# Altium PCB MAIN.PcbDoc
Units mil, origin at the board's own origin, x right, y up, seen from the top; angles counter-clockwise.
Board outline 6000 x 4000 mil, 2 copper layers (Top Layer, Bottom Layer); 86 components, 71 nets, 333 pads, 40 vias.
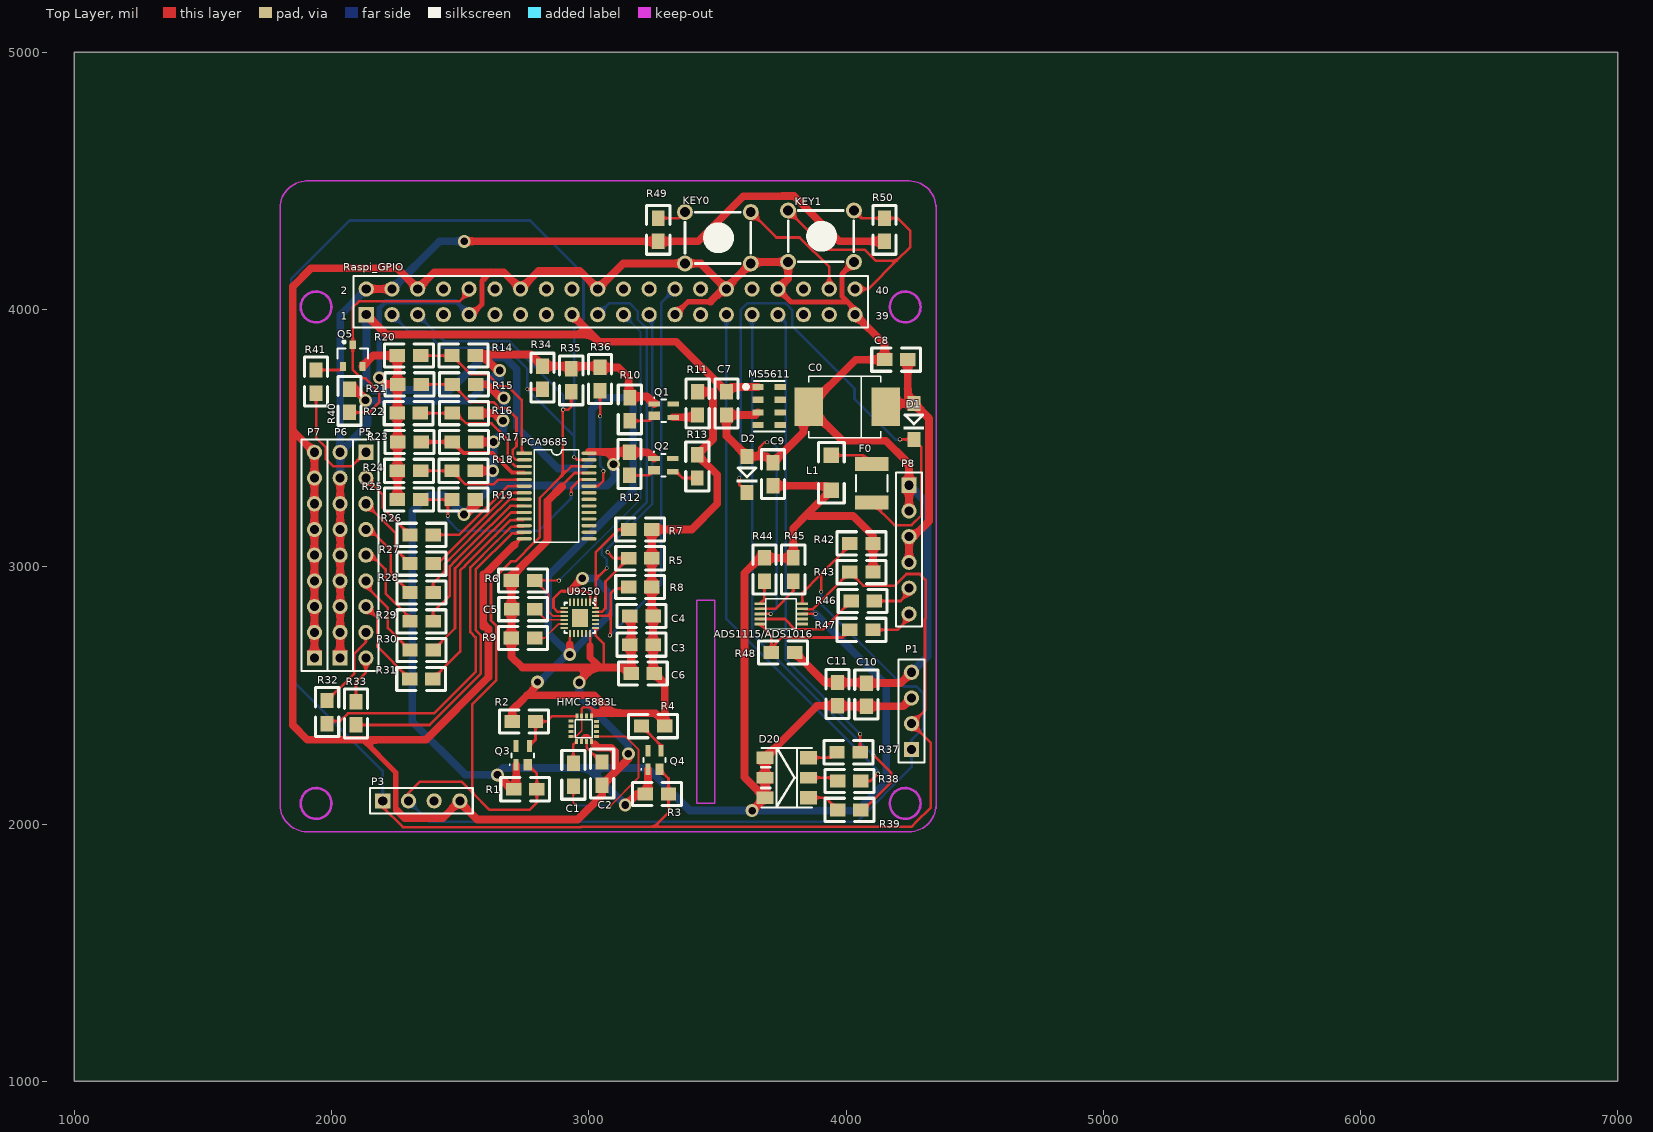
[diagram p0: Top Layer view]
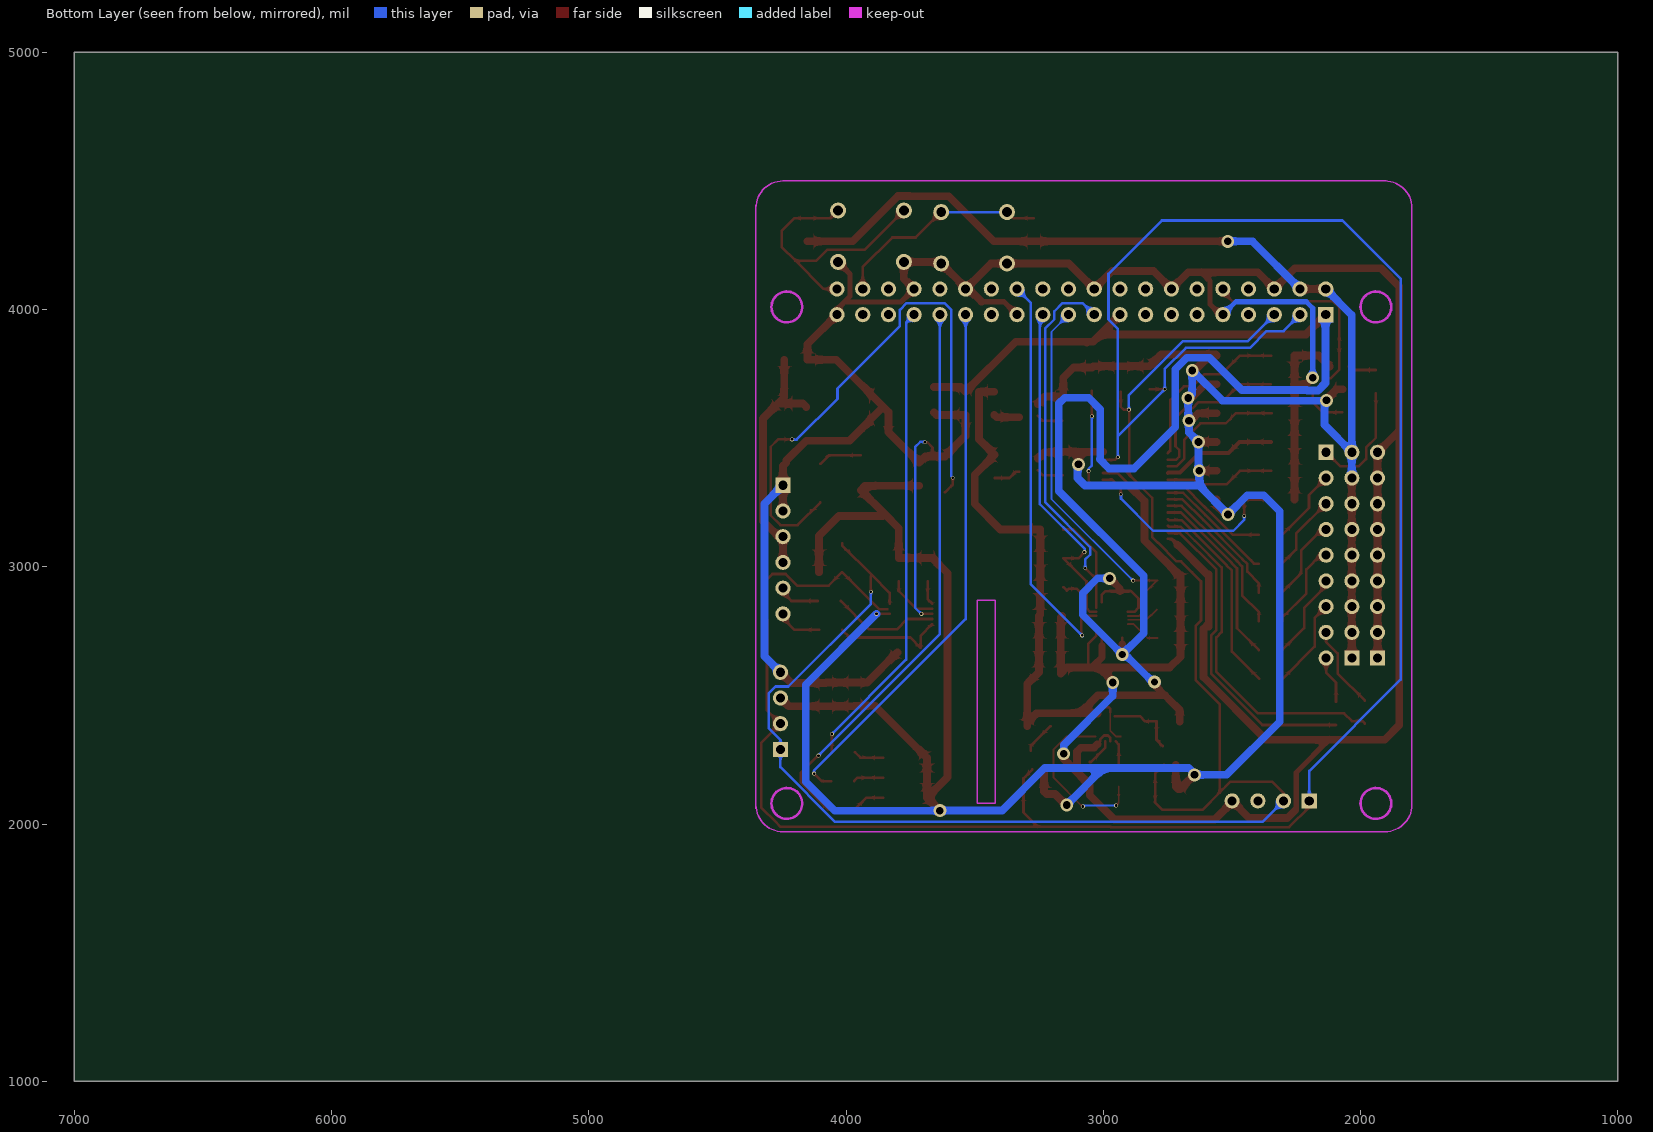
[diagram p1: Bottom Layer view, seen from below]

## Layer stack, top to bottom
Top Solder: solder mask 0.4, Solder Resist, Dk 3.5
Top Layer: signal copper 1.4
Dielectric 1: dielectric 12.6, FR-4, Dk 4.8
Bottom Layer: signal copper 1.4
Bottom Solder: solder mask 0.4, Solder Resist, Dk 3.5

## Board outline
1000,1000 7000,1000 7000,5000 1000,5000

## Design rules (kind name [scope] priority, off if disabled: settings)
Clearance [All] p1: gap=10
PolygonConnect [All] p1: connectstyle=Relief reliefconductorwidth=10 reliefentries=4 polygonreliefangle="90 Angle" airgapwidth=10
RoutingVias [All] p1: holewidth=28 width=50 viastyle="Through Hole" minholewidth=28 minwidth=50 maxholewidth=28 maxwidth=50
SolderMaskExpansion [All] p1: expansion=4
Width [All] p1: maxlimit=100 minlimit=2 preferedwidth=30
30 further rules are at their usual default settings.

## Classes and differential pairs
component class ADS1115: ADS1115/ADS1016 C10 C11 R42 R43 R44 R45 R46 R47 R48
component class 9250: C3 C4 C5 C6 R5 R6 R7 R8 R9 U9250
component class HMC5883L: C1 C2 Q3 Q4 R1 R2 R3 R4
component class MS5611: C7 MS5611 Q1 Q2 R10 R11 R12 R13
component class PCA9685: C9 P3 P5 P6 P7 PCA9685 R14 R15 R16 R17 R18 R19 R20 R21 R23 R24 R25 R26 R27 R28 R29 R30 R31 R32 R33 R34 R35 R36
component class "power source": C0 C8 D1 D2 F0 L1 P8 Q5 R40 R41
component class Rpi_GPIO: D20 KEY0 KEY1 P1 R37 R38 R39 R49 R50 Raspi_GPIO

## Components (designator, comment, footprint, x,y, rotation, side; value= is the part's Value field where it differs from the comment)
ADS1115/ADS1016 "ADS1115/ADS1015" PCBComponent_1#1 3531.14,3190.71 r90 top
C0 "Cap-Pol-ER" DIODE_SMC 4005,3621.49 r180 top
C1 "224" 0805 2940.06,2236.09 r270 top
C2 "224" 0805 3051.95,2151.09 r90 top
C3 "0.1uF" 0805 3160,2697.02 r0 top
C4 "0.01uF" 0805 3160,2809.03 r0 top
C5 "0.1uF" 0805 2700,2835.06 r0 top
C6 "10uF" 0805 3165,2585.01 r0 top
C7 "0.1uF" 0805 3535.37,3680 r270 top
C8 "104" 0805 4240,3805 r180 top
C9 "0.1uF" 0805 3716.05,3315 r90 top
C10 "0.1uF" 0805 4079.1,2548 r270 top
C11 "1uF" 0805 3967.09,2550 r270 top
D1 "1N4148" DIODE_SOP 4264.01,3635 r270 top
D2 "Diode-Z" DIODE_SOP 3615.1,3428.96 r270 top
D20 "LED-RGB" LED_5050_RGB 3790,2170 r0 top
F0 "500MA" 1812 4100,3325 r90 top
"HMC 5883L" "HMC 5883L" PCBComponent_1#2 2511.3,2456.77 r90 top
KEY0 "PWR_KEY" KEY_M 3374.09,4378.95 r0 top
KEY1 "PWR_KEY" KEY_M 3775,4385 r0 top
L1 "Inductor" 1206 3943.12,3432.98 r270 top
MS5611 "MS5611" MS5611 3701.16,3624.61 r0 top
P1 "Header 4" HDR1X4 4255,2290 r90 top
P3 "Header 4" HDR1X4 2199,2090 r0 top
P5 "Header 9" HDR1X9 2133.46,3445 r270 top
P6 "Header 9" HDR1X9 2033.46,2645 r90 top
P7 "Header 9" HDR1X9 1933.46,2645 r90 top
P8 "Header 6" HDR1X6 4245,3317 r270 top
PCA9685 "PCA9685PW" PCA9685PW 2875,3275 r0 top
Q1 "MOSFET-N" SOT-343_N 3291.42,3606.7 r0 top
Q2 "MOSFET-N" SOT-343_N 3290,3395 r0 top
Q3 "MOSFET-N" SOT-343_N 2743.3,2266.94 r90 top
Q4 "MOSFET-N" SOT-343_N 3255.59,2248.58 r90 top
Q5 "9013" SOT23_L 2082.4,3820.97 r90 top
R1 "Res2" 0805 2797.99,2135 r180 top
R2 "Res2" 0805 2792.99,2398.75 r180 top
R3 "Res2" 0805 3310,2116.64 r180 top
R4 "Res2" 0805 3205,2380.52 r0 top
R5 "Res2" 0805 3245,3032.93 r180 top
R6 "Res2" 0805 2789.38,2946.95 r180 top
R7 "Res2" 0805 3245,3144.94 r180 top
R8 "Res2" 0805 3245,2920.92 r180 top
R9 "Res2" 0805 2699.38,2723.05 r0 top
R10 "Res2" 0805 3159.48,3567.01 r90 top
R11 "Res2" 0805 3423.23,3590 r90 top
R12 "Res2" 0805 3158.06,3355 r90 top
R13 "Res2" 0805 3421.81,3345 r90 top
R14 "Res2" 0805 2558.3,3821.07 r180 top
R15 "Res2" 0805 2560,3709.06 r180 top
R16 "Res2" 0805 2560,3597.05 r180 top
R17 "Res2" 0805 2560,3485.04 r180 top
R18 "Res2" 0805 2558.3,3373.03 r180 top
R19 "Res2" 0805 2558.3,3261.02 r180 top
R20 "Res2" 0805 2346.3,3821.07 r180 top
R21 "Res2" 0805 2347.99,3709.06 r180 top
R22 "Res2" 0805 2345,3597.05 r180 top
R23 "Res2" 0805 2347.99,3485.04 r180 top
R24 "Res2" 0805 2346.3,3373.03 r180 top
R25 "Res2" 0805 2346.3,3261.02 r180 top
R26 "Res2" 0805 2305,3124.13 r0 top
R27 "Res2" 0805 2305,3012.12 r0 top
R28 "Res2" 0805 2305,2900.11 r0 top
R29 "Res2" 0805 2305,2788.1 r0 top
R30 "Res2" 0805 2305,2676.09 r0 top
R31 "Res2" 0805 2303.41,2564.08 r0 top
R32 "Res2" 0805 1983.05,2480 r270 top
R33 "Res2" 0805 2095.06,2475 r270 top
R34 "Res2" 0805 2819.94,3690 r90 top
R35 "Res2" 0805 2931.95,3680 r90 top
R36 "Res2" 0805 3043.96,3685 r90 top
R37 "Res2" 0805 4055,2278.9 r180 top
R38 "Res2" 0805 4058.12,2166.89 r180 top
R39 "Res2" 0805 4058.12,2054.88 r180 top
R40 "Res2" 0805 2069.94,3600 r90 top
R41 "Res2" 0805 1940,3765 r270 top
R42 "Res2" 0805 4105,3090.97 r180 top
R43 "Res2" 0805 4105,2978.96 r180 top
R44 "Res2" 0805 3683.05,3034.26 r270 top
R45 "Res2" 0805 3795.06,3034.26 r270 top
R46 "Res2" 0805 4020,2867.07 r0 top
R47 "Res2" 0805 4015,2755.06 r0 top
R48 "Res2" 0805 3710,2667.07 r0 top
R49 "Res2" 0805 3269.94,4265 r90 top
R50 "Res2" 0805 4150,4265 r90 top
Raspi_GPIO "Header 20X2" HDR2X20 2135,3980 r0 top
U9250 "MPU-9250" QFN40P300X300X105-25N 2965.63,2801.02 r270 top

## Footprints (in the part's own frame and the unit in brackets; to place one, negate y for a bottom-side part, rotate by r counter-clockwise, add the part's x,y. Pads: shape width x height; smd on the part's side, far side on the other; paste and mask are expansions set on the pad)
0805 [mil]
  rect 60x50 smd: 1(0,-0.06) 2(90,-0.06)
  silkscreen extent -50,-45 140,45
1206 [mil]
  rect 60x60 smd: 1(0,0) 2(135,0)
  silkscreen extent -50,-50 185,50
1812 [mm] "Chip Capacitor, Body 4.5x3.2mm, IPC High Density"
  rect 1.4x3.3 smd: 1(-1.9,0) 2(1.9,0)
  silkscreen extent -0.8,-1.55 0.8,1.55, body extent -2.4,-1.7 2.4,1.7, height 1.4
DIODE_SMC [mil] "Diode; 2 Leads"
  rect 110x150 smd: 1(-150,0) 2(150,0)
  silkscreen extent -130,-120 150,120
DIODE_SOP [mm]
  rect 1.5x1.3 smd: 1(0,0) 2(3.556,0)
  silkscreen extent 1.14,-1.02 2.56,1.02
HDR1X4 [mm] "Connector; Header; 4 Position"
  rect 1.5x1.5 hole 0.9: 1(0,0)
  round 1.5 hole 0.9: 2(2.54,0) 3(5.08,0) 4(7.62,0)
  silkscreen extent -1.27,-1.27 8.89,1.27
HDR1X6 [mm] "Connector; Header; 6 Position"
  rect 1.5x1.5 hole 0.9: 1(0,0)
  round 1.5 hole 0.9: 2(2.54,0) 3(5.08,0) 4(7.62,0) 5(10.16,0) 6(12.7,0)
  silkscreen extent -1.27,-1.27 13.97,1.27
HDR1X9 [mm] "Connector; Header; 9 Position"
  rect 1.5x1.5 hole 0.9: 1(0,0)
  round 1.5 hole 0.9: 2(2.54,0) 3(5.08,0) 4(7.62,0) 5(10.16,0) 6(12.7,0) 7(15.24,0) 8(17.78,0) 9(20.32,0)
  silkscreen extent -1.27,-1.27 21.59,1.27
HDR2X20 [mm] "Connector; Header; 20x2 Position"
  rect 1.5x1.5 hole 0.9: 1(0,0)
  round 1.5 hole 0.9: 2(0,2.54) 3(2.54,0) 4(2.54,2.54) 5(5.08,0) 6(5.08,2.54) 7(7.62,0) 8(7.62,2.54) 9(10.16,0) 10(10.16,2.54) 11(12.7,0) 12(12.7,2.54) 13(15.24,0) 14(15.24,2.54) 15(17.78,0) 16(17.78,2.54) 17(20.32,0) 18(20.32,2.54) 19(22.86,0) 20(22.86,2.54) 21(25.4,0) 22(25.4,2.54) 23(27.94,0) 24(27.94,2.54) 25(30.48,0) 26(30.48,2.54) 27(33.02,0) 28(33.02,2.54) 29(35.56,0) 30(35.56,2.54) 31(38.1,0) 32(38.1,2.54) 33(40.64,0) 34(40.64,2.54) 35(43.18,0) 36(43.18,2.54) 37(45.72,0) 38(45.72,2.54) 39(48.26,0) 40(48.26,2.54)
  silkscreen extent -1.27,-1.27 49.53,3.81
KEY_M [mil]
  round 62 hole 38: 1(0,0) 1(255.91,0) 2(0,-200) 2(255.91,-200)
  silkscreen extent 0,-200 255,0
LED_5050_RGB [mm]
  rect 1.7x1.25 smd: A(-2.658,-1.721) A(-2.658,2.229)
  rect 1.7x1.1 smd: A(-2.658,0.254) K2(1.642,0.254)
  rect 1.7x1.3 smd: K1(1.642,2.229) K3(1.642,-1.721)
  silkscreen extent -3.05,-2.67 1.99,3.17
MS5611 [mm]
  rect 1.1x0.6 smd: 1(-1.1,1.875) 2(-1.1,0.625) 3(-1.1,-0.625) 4(-1.1,-1.875) 5(1.1,-1.875) 6(1.1,-0.625) 7(1.1,0.625) 8(1.1,1.875)
  silkscreen extent -2.41,-2.5 1.5,2.5
PCA9685PW [mm]
  rect 1.5x0.325 smd: 1(-3.2,4.225)
  oval 1.5x0.325 smd: 2(-3.2,3.575) 3(-3.2,2.925) 4(-3.2,2.275) 5(-3.2,1.625) 6(-3.2,0.975) 7(-3.2,0.325) 8(-3.2,-0.325) 9(-3.2,-0.975) 10(-3.2,-1.625) 11(-3.2,-2.275) 12(-3.2,-2.925) 13(-3.2,-3.575) 14(-3.2,-4.225) 15(3.2,-4.225) 16(3.2,-3.575) 17(3.2,-2.925) 18(3.2,-2.275) 19(3.2,-1.625) 20(3.2,-0.975) 21(3.2,-0.325) 22(3.2,0.325) 23(3.2,0.975) 24(3.2,1.625) 25(3.2,2.275) 26(3.2,2.925) 27(3.2,3.575) 28(3.2,4.225)
  silkscreen extent -2.2,-4.55 2.2,4.55
PCBComponent_1#1 [mm]
  rect 0.27x1.1 smd: 1(-8.5,-3.4) 2(-9,-3.4) 3(-9.5,-3.4) 4(-10,-3.4) 5(-10.5,-3.4) 6(-10.5,-7.6) 7(-10,-7.6) 8(-9.5,-7.6) 9(-9,-7.6) 10(-8.5,-7.6)
  silkscreen extent -11,-7 -8,-4
PCBComponent_1#2 [mm]
  rect 0.5x0.3 smd: 1(-0.95,-11.25) 2(-0.95,-11.7) 3(-0.95,-12.2) 4(-0.95,-12.7) 9(-3.45,-12.7) 10(-3.45,-12.2) 11(-3.45,-11.7) 12(-3.45,-11.2)
  rect 0.3x0.5 smd: 5(-1.5,-13.175) 6(-1.95,-13.175) 7(-2.45,-13.175) 8(-2.95,-13.175) 13(-2.95,-10.675) 14(-2.45,-10.675) 15(-1.95,-10.675) 16(-1.45,-10.675)
  silkscreen extent -3.08,-12.78 -1.33,-11.07
QFN40P300X300X105-25N [mm]
  rect 0.7x0.2 smd paste-25.4 mask-25.4: 1(-1.55,1) 2(-1.55,0.6) 3(-1.55,0.2) 4(-1.55,-0.2) 5(-1.55,-0.6) 6(-1.55,-1) 13(1.55,-1) 14(1.55,-0.6) 15(1.55,-0.2) 16(1.55,0.2) 17(1.55,0.6) 18(1.55,1)
  rect 0.2x0.7 smd paste-25.4 mask-25.4: 7(-1,-1.55) 8(-0.6,-1.55) 9(-0.2,-1.55) 10(0.2,-1.55) 11(0.6,-1.55) 12(1,-1.55) 19(1,1.55) 20(0.6,1.55) 21(0.2,1.55) 22(-0.2,1.55) 23(-0.6,1.55) 24(-1,1.55)
  rect 1.75x1.6 smd mask-25.4: 25(0,0)
  silkscreen extent -1.93,-1.5 1.5,1.63
SOT23_L [mm] "SOT23, 3-Leads, Body 2.9x1.3mm, Pitch 0.95mm, Lead Span 2.3mm - Reverse Pinning, IPC High Density"
  rect 0.85x0.6 smd: 1(1.075,0) 2(-1.075,-0.95) 3(-1.075,0.95)
  silkscreen extent -0.3,-1.5 1.47,1.5, body extent -0.7,-1.5 0.7,1.5, height 1.1
SOT-343_N [mm] "SOT343, 4-Leads, Body 2x1.3 mm, Pitch 1.3mm, Lead Span 2.1mm, IPC Medium Density"
  rect 1.15x0.5 smd: 1(-0.925,0.65) 3(0.925,-0.65) 4(0.925,0.65)
  rect 1.15x0.8 smd: 2(-0.925,-0.5)
  silkscreen extent -0.97,-1.1 0.2,1.35, body extent -0.7,-1.1 0.7,1.1, height 1

## Part data
C0: "插件电解电容"
C1 C2 C3 C4 C5 C6 C7 C8 C9 C10 C11: library part C
D1: library part Diode, "二极管"
D2: "稳压二极管"
D20: "三基色LED"
F0: library part "Fuse 2", "Fuse"
KEY0 KEY1: library part KEY_M
L1: "电感"
P1 P3: "Header, 4-Pin"
P5 P6 P7: "Header, 9-Pin"
P8: "Header, 6-Pin"
Q1 Q2 Q3 Q4: library part MOSFET-N1, "MOSFET"
Q5: library part 2N3904, "NPN General Purpose Amplifier"
R1 R2 R3 R4 R5 R6 R7 R8 R9 R10 R11 R12 R13 R14 R15 R16 R17 R18 R19 R20 R21 R22 R23 R24 R25 R26 R27 R28 R29 R30 R31 R32 R33 R34 R35 R36 R37 R38 R39 R40 R41 R42 R43 R44 R45 R46 R47 R48 R49 R50: "Resistor"
Raspi_GPIO: "Header, 20-Pin, Dual row"

## Via types
v1: diameter 15, hole 10, Top Layer to Bottom Layer, 22 vias
v2: diameter 50, hole 30, Top Layer to Bottom Layer, 15 vias
v3: diameter 50, hole 28, Top Layer to Bottom Layer, 3 vias

## Nets (pads, with @x,y where several pads share a name; then routed paths per layer and width w, separated by ;. In a path a pad name is that pad's centre, name@x,y a point inside that pad or via, vN(x,y) a via of type N, cw(c..) or ccw(c..) an arc to the next point about the centre after c; other vN are vias at no path point)
ADDR: ADS1115/ADS1016.1 R44.2 | length 95
  Top Layer w10: ADS1115/ADS1016.1@3665,2856.7 3682.99,2874.69 R44.2
ALERT: ADS1115/ADS1016.2 R45.2 | length 197.7
  Top Layer w10: ADS1115/ADS1016.2 3726.38,2836.38 3795,2905 R45.2
AN0: P8.5 R46.2 | length 165.7
  Top Layer w10: R46.2 4212.01,2867.01 4245,2900 P8.5
AN1: P8.6 R47.2 | length 175.6
  Top Layer w10: R47.2 4199.95,2755 4245,2800.05 P8.6
BACKUP_1: Raspi_GPIO.11
BACKUP_2: Raspi_GPIO.13
"BEC 5V": C0.1 C8.1 D1.1 P8.3 P8.4 | length 978.9
  Top Layer w30: C0.1 4168.51,3635 D1.1 ; C8.1 4240,3659.01 D1.1 ; P8.4 P8.3 4261.95,3117 4322.5,3177.55 4322.5,3576.51 D1.1
BEC_5V: 
GND: "HMC 5883L.9" "HMC 5883L.11" ADS1115/ADS1016.3 C0.2 C2.1 C3.1 C4.1 C5.1 C6.1 C7.2 C8.2 C9.2 C10.1 C11.1 D2.1 KEY0.2 KEY1.2 MS5611.3 P1.4 P3.4 P7.1 P7.2 P7.3 P7.4 P7.5 P7.6 P7.7 P7.8 P7.9 P8.1 P8.2 PCA9685.14 PCA9685.25 Q5.2 R6.2 R9.1 R20.2 R21.2 R22.2 R23.2 R24.2 R25.2 R48.2 Raspi_GPIO.6 Raspi_GPIO.9 Raspi_GPIO.14 Raspi_GPIO.20 Raspi_GPIO.25 Raspi_GPIO.30 Raspi_GPIO.34 Raspi_GPIO.39 U9250.18 U9250.19 | length 17000.2
  Top Layer w10: 2711,3085 2734.66,3108.66 PCA9685.14 ; 2896.06,3311.94 2896.06,3316.19 2944.43,3364.57 PCA9685.25 ; 2971.93,2320.94 2971.93,2333.93 2982,2344 2997,2344 3011.3,2329.7 3011.3,2320.94 ; 3005,2693 U9250.18 ; U9250.19 3026.65,2732.35 3058,2701 3058,2612.74 3062,2608.74 ; 3664,3428.96 3664,3464 3684,3484 v1(3693,3484) ; ADS1115/ADS1016.3 v1(3707,2816.7)
  Top Layer w20: 2122,2328 2249.47,2200.53 2249.47,2057.95 2253.53,2053.9 ; Raspi_GPIO.9@2545,3980 2585.47,4020.47 2585.47,4111.47 2619,4145 ; Raspi_GPIO.25 3385.47,4030.47 3472.53,4030.47 3473,4030 ; Raspi_GPIO.34 3786,4029 3813.96,4029 3814.49,4029.53 4001.58,4029.53 4004.06,4032 ; KEY1.2@4030.91,4185 3984.53,4138.62 3984.53,4051.53 4004.06,4032 ; Raspi_GPIO.39 4035,4001.06 4004.06,4032
  Top Layer w22: Raspi_GPIO.9 Raspi_GPIO.9@2545,3980
  Top Layer w28: 3005,2693 3005,2647.74 3035.37,2617.37
  Top Layer w30: 1853,3525.46 P7.9 P7.8 P7.7 P7.6 P7.5 P7.4 P7.3 P7.2 P7.1 ; Q5.2 2162.29,3821.13 R20.2 R21.2@2256.3,3709.12 ; v2(2186,3735) 2211.88,3709.12 R21.2@2256.3,3709.12 ; 2253.53,2053.9 2284.43,2023 2432,2023 P3.4 2499,2084.5 2566,2017.5 2957.5,2017.5 3052.01,2112.01 C2.1 3052.37,2151.09 3102.01,2200.74 ; R25.2 R24.2 2256.3,3597.11 2256.3,3707.43 R21.2 R21.2@2256.3,3709.12 ; 2590,2766.57 2590,2970 2596,2970 2711,3085 ; 2596.21,2772.79 2610,2759 2610,2570.86 2367.14,2328 2122,2328 1906,2328 1849.22,2384.78 1849.22,4089.22 1920,4160 2255,4160 Raspi_GPIO.6 2400,4145 2619,4145 2670,4145 Raspi_GPIO.14 2805,4150 2965,4150 Raspi_GPIO.20 3133.95,4178.95 3374.09,4178.95 3436.05,4178.95 Raspi_GPIO.30 ; 2896.06,3311.94 2840,3255.89 2840,3102.57 2699.38,2961.96 R6.2 R9.1 2699.38,2650.62 2741.26,2608.74 3015.74,2608.74 ; v2@2958,2551 3015.74,2608.74 ; 3022.52,2309.72 3036.15,2296.09 3087.37,2296.09 3102.01,2281.45 3102.01,2200.74 ; v2@3154.5,2253.23 3102.01,2200.74 ; C4.1 3165,2803.97 C6.1 3141.21,2608.74 3062,2608.74 3015.74,2608.74 ; 3473,4030 3523,4080 Raspi_GPIO.30 ; MS5611.3 3647.85,3590 C7.2 3535.3,3508.76 D2.1 3664,3428.96 3692.15,3428.96 C9.2 3835,3523.89 3835,3601.49 C0.2 ; Raspi_GPIO.34 3775,4120 3775,4185 3636.05,4185 3630,4178.95 3535,4083.95 Raspi_GPIO.30 ; R48.2 3917.01,2550 C11.1 4077.03,2550 C10.1 4213,2548 P1.4 ; Raspi_GPIO.39 4150,3865 C8.2 4038.57,3805.06 C0.2 ; P8.2 P8.1 4245,3392 4232,3405 4232,3413 4155,3490 3986.49,3490 C0.2
  Bottom Layer w10: v1(3693,3484) 3695,3486 3711,3486 3731,3466 3731,2840.7 v1(3707,2816.7)
  Bottom Layer w20: v2(2186,3735) 2185.47,3735.53 2185.47,4004.94 2211,4030.47 2484.53,4030.47 Raspi_GPIO.9
  Bottom Layer w30: v2(2963,2550) 2963,2498 3154,2307 v2(3154,2273) ; P8.1 4317,3245 4317,2652 P1.4
"I2C_SCL 1": Q1.3 R11.1 | length 99.1
  Top Layer w30: Q1.3 3414.4,3581.1 R11.1
"I2C_SCL 2": "HMC 5883L.1" Q3.3 R2.1 | length 275.2
  Top Layer w10: Q3.3 2792.99,2327.45 R2.1 2836.82,2398.82 2857.37,2419.37 2954.21,2419.37
"I2C_SDA 1": Q2.3 R13.1 | length 105.6
  Top Layer w10: Q2.3 3340.59,3369.41 3365,3345 R13.1
"I2C_SDA 2": Q4.3 R4.1 | length 127
  Top Layer w10: R4.1 3281.18,2304.28 Q4.3
KEY_0: KEY0.1 R49.2 Raspi_GPIO.38 | length 848.5
  Top Layer w10: R49.2 3350.15,4355 KEY0.1@3374.09,4378.95 ; KEY0.1@3630,4378.95 3728.95,4280 3820,4280 3935,4165 Raspi_GPIO.38
  Bottom Layer w10: KEY0.1@3374.09,4378.95 KEY0.1@3630,4378.95
KEY_1: KEY1.1 R50.2 Raspi_GPIO.40 | length 1100.1
  Top Layer w10: KEY1.1@3775,4385 3928,4232 4073,4232 4115,4190 4197,4190 ; KEY1.1@4030.91,4385 4060.91,4355 R50.2 4201,4355 4250,4306 4250,4243 4197,4190 ; Raspi_GPIO.40 4087,4080 4197,4190
LED_B: R37.1 Raspi_GPIO.33 | length 1833.6
  Top Layer w10: R37.1 v1(4055,2350)
  Bottom Layer w10: Raspi_GPIO.33 3766,3949 3766,2639 v1(4055,2350)
LED_G: R39.1 Raspi_GPIO.31 | length 2204.3
  Top Layer w10: R39.1 4067.95,2054.95 4176,2163 4176,2198 4108,2266 v1(4107,2266)
  Bottom Layer w10: Raspi_GPIO.31 3635,2738 v1(4107,2266)
LED_R: R38.1 Raspi_GPIO.29 | length 2105.9
  Top Layer w10: R38.1 4094.96,2166.96 v1(4124,2196)
  Bottom Layer w10: Raspi_GPIO.29 3535,2797 4124,2208 v1(4124,2196)
MPU9250_CS: R8.2 Raspi_GPIO.26 U9250.22 | length 1769.8
  Top Layer w10: U9250.22 3066.19,2808.9 3066.29,2809 3075.01,2809 3085.01,2818.99 ; v1(3082,2733) 3085.01,2736.01 3085.01,2818.99 ; R8.2 3141.02,2907 3133.02,2915 3104,2915 3085.01,2896.01 3085.01,2818.99
  Bottom Layer w10: v1@3079,2730 v1(3082,2733) 3282,2933 3282,4027 Raspi_GPIO.26
MPU9250_INT: Raspi_GPIO.16
NetADS1115/ADS1016_4: ADS1115/ADS1016.4 R46.1 | length 416.6
  Top Layer w10: ADS1115/ADS1016.4 3692.99,2797.01 ; 3693.5,2797.01 3762.49,2797.01 3802.49,2757.01 3910,2757.01 R46.1
NetADS1115/ADS1016_5: ADS1115/ADS1016.5 R47.1 R48.1 | length 444.3
  Top Layer w10: ADS1115/ADS1016.5@3665,2776.7 3710,2731.7 3710,2685 3750,2725 3985,2725 R47.1
NetC1_1: "HMC 5883L.12" C1.1 | length 89.4
  Top Layer w10: C1.1 2940,2309.92 2951.02,2320.94
NetC1_2: "HMC 5883L.8" C1.2 | length 663.6
  Top Layer w7: C1.2 2940,2082 v1(2950,2072) ; 3030,2340.63 3142.37,2340.63 3193,2290 3193,2179.45 3081.55,2068 v1(3079,2068)
  Bottom Layer w7: v1(2950,2072) 3075,2072 v1(3079,2068)
NetC2_2: "HMC 5883L.10" C2.2 | length 107.3
  Top Layer w10: 2991.61,2320.94 2991.61,2297.39 3047.91,2241.09 C2.2
NetC5_2: C5.2 U9250.10 | length 131.9
  Top Layer w5: C5.2 2831.85,2793.15 U9250.10
NetD1_2: D1.2 D2.2 F0.1 | length 2241.6
  Top Layer w10: v1(3585,3346) 3585,3319.07 D2.2 ; F0.1 4188.67,3161.53 4254.53,3161.53 4292.5,3199.5 4292.5,3466.51 D1.2 v1(4210,3495)
  Bottom Layer w10: v1(3585,3346) 3590.47,3351.47 3590.47,3998.44 3616.56,4024.53 3765,4024.53 3790.47,3999.06 3790.47,3935.47 4033,3692.94 4033,3653 4192,3494 4209,3494 v1(4210,3495)
NetD20_1: D20.K1 R37.2 | length 119.1
  Top Layer w10: D20.K1 3943.79,2257.76 R37.2
NetD20_3: D20.K2 R38.2 | length 118.9
  Top Layer w10: D20.K2 3955.08,2180 R38.2
NetD20_4: D20.K3 R39.2 | length 133.1
  Top Layer w10: D20.K3 3920.82,2102.24 R39.2
NetF0_2: F0.2 L1.1 | length 170.6
  Top Layer w10: L1.1 4066.82,3432.98 F0.2
NetPCA9685_1: PCA9685.1 R14.2 R20.1 | length 675.8
  Top Layer w10: R20.1 R14.2 2540.32,3749.12 2605.88,3749.12 2653.5,3701.5 2686.5,3701.5 2739,3649 2739,3451.36 PCA9685.1
NetPCA9685_2: PCA9685.2 R15.2 R21.1 | length 631.1
  Top Layer w10: R21.1 R15.2 2539.12,3640 2629.43,3640 2653.43,3616 2682,3616 2719,3579 2719,3468.46 2704.49,3453.95 2704.49,3428.73 2717.47,3415.75 PCA9685.2
NetPCA9685_3: PCA9685.3 R16.2 R22.1 | length 533.5
  Top Layer w10: R22.1 R16.2 2483.79,3597.11 2523.79,3557.11 2621.89,3557.11 2627,3552 2627,3551.43 2650.43,3528 2651,3528 2684.49,3494.51 2684.49,3420.44 2714.77,3390.16 PCA9685.3
NetPCA9685_4: PCA9685.4 R17.2 R23.1 | length 451
  Top Layer w15: R23.1 R17.2 2512.55,3442.55 2625.63,3442.55 2701.92,3366.26 2747.32,3366.26 PCA9685.4
NetPCA9685_5: PCA9685.5 R18.2 R24.1 | length 432.6
  Top Layer w10: R24.1 R18.2 2521.39,3320 2630.39,3320 2649.37,3338.98 PCA9685.5
NetPCA9685_6: PCA9685.6 R26.2 | length 433
  Top Layer w10: R26.2 2496.07,3124.07 2593.08,3221.08 2594.52,3221.08 2603.3,3229.87 2603.3,3230.88 2606.71,3234.28 2607.72,3234.28 2686.83,3313.39 PCA9685.6
NetPCA9685_7: PCA9685.7 R27.2 | length 468.9
  Top Layer w10: R27.2 2413.78,3012.06 2425.36,3023.64 2425.36,3024.78 2601.66,3201.08 2602.8,3201.08 2689.52,3287.8 PCA9685.7
NetPCA9685_8: PCA9685.8 R28.2 | length 542.7
  Top Layer w10: R28.2 2395,2935.85 2440,2980.85 2440,3009.99 2460,3029.99 2460,3031.14 2609.94,3181.08 2611.09,3181.08 2692.21,3262.21 PCA9685.8
NetPCA9685_9: PCA9685.9 R29.2 | length 627.6
  Top Layer w10: R29.2 2395,2823.84 2460,2888.84 2460,3001.71 2480,3021.71 2480,3022.85 2618.23,3161.08 2619.37,3161.08 2694.91,3236.61 PCA9685.9
NetPCA9685_10: PCA9685.10 R30.2 | length 712.4
  Top Layer w10: R30.2 2480,2761.03 2480,2993.43 2500,3013.43 2500,3014.57 2626.51,3141.08 2627.66,3141.08 2697.6,3211.03 PCA9685.10
NetPCA9685_11: PCA9685.11 R31.2 | length 797.9
  Top Layer w10: R31.2 2500,2670.61 2500,2985.14 2520,3005.14 2520,3006.28 2634.8,3121.08 2635.94,3121.08 2696.1,3181.24 2744.82,3181.24 PCA9685.11
NetPCA9685_12: PCA9685.12 R32.2 | length 1351.3
  Top Layer w10: R32.2 1992.99,2400 2033.79,2400 2063.79,2430 2398.43,2430 2560,2591.57 2560,2725.86 2540,2745.86 2540,2998 2540.72,2998 2643.8,3101.08 2644.22,3101.08 2698.79,3155.65 2744.82,3155.65 PCA9685.12
NetPCA9685_13: PCA9685.13 R33.2 | length 1230.3
  Top Layer w10: R33.2 2381.72,2385 2580,2583.28 2580,2734.15 2560,2754.15 2560,2989 2560.43,2989 2701.49,3130.06 2744.82,3130.06 PCA9685.13
NetPCA9685_24: PCA9685.24 R19.2 R25.1 | length 879.8
  Top Layer w10: R25.1 R19.2 2452,3244.78 v1(2452,3198) ; v1(2932,3282) 2932,3305.46 2965.51,3338.98 PCA9685.24
  Bottom Layer w10: v1(2452,3198) 2452,3182 2494,3140 2806,3140 2931,3265 2931,3281 v1(2932,3282)
NetQ1_2: Q1.2 R10.1 | length 103.7
  Top Layer w10: R10.1 3235,3567.01 Q1.2
NetQ2_2: Q2.2 R12.1 | length 103.9
  Top Layer w10: R12.1 3233.27,3355 Q2.2
NetQ5_2: Q5.3 R41.1 | length 110.7
  Top Layer w10: R41.1 2031.35,3765 Q5.3
NetR9_2: R9.2 U9250.11 | length 137.8
  Top Layer w7: R9.2 2827.99,2722.99 2882,2777 2904.2,2777 U9250.11
OE: PCA9685.23 R36.1 | length 420.7
  Top Layer w10: PCA9685.23 3036,3313.39 3057,3334.39 v1(3057,3372) ; v1(3044.02,3584.98) R36.1
  Bottom Layer w10: v1(3044.02,3584.98) 3044.02,3393.98 3057,3381 v1(3057,3372)
PPM_DECODE: Raspi_GPIO.7
RPI_PWM: Raspi_GPIO.12
"RPI_PWM 1": P5.2 R26.1 | length 292
  Top Layer w10: P5.2 2200,3278.46 2200,3229.07 R26.1
"RPI_PWM 2": P5.3 R27.1 | length 304
  Top Layer w10: P5.3 2250,3128.46 2250,3067.06 R27.1
"RPI_PWM 3": P5.4 R28.1 | length 325.7
  Top Layer w10: P5.4 2150,3145 2230,3065 2230,2975.05 ; 2230,2975 2230,2975.05 ; R28.1 2230,2975.05
"RPI_PWM 4": P5.5 R29.1 | length 340.6
  Top Layer w10: P5.5 2155,3045 2210,2990 2210,2896.75 2305,2801.75 R29.1
"RPI_PWM 5": P5.6 R30.1 | length 340
  Top Layer w10: P5.6 2133.46,2925.77 2219.23,2840 2219.23,2761.8 R30.1
"RPI_PWM 6": P5.7 R31.1 | length 351.4
  Top Layer w10: P5.7 2177.99,2800.47 2177.99,2689.44 R31.1
"RPI_PWM 7": P5.8 R32.1 | length 327.3
  Top Layer w10: R32.1 2088.94,2585.95 2088.94,2663.44 2133.46,2707.97 P5.8
"RPI_PWM 8": P5.9 R33.1 | length 185.9
  Top Layer w10: R33.1 2095,2550 2133.46,2588.46 P5.9
SBUS_IN: P5.1 R41.2 | length 462
  Top Layer w10: R41.2 1939.94,3501.5 1977.99,3463.44 1977.99,3419 1979,3419 2008,3390 2078.46,3390 P5.1
SCL: ADS1115/ADS1016.10 P1.1 P3.2 PCA9685.26 Q3.2 R1.1 R35.1 R42.2 Raspi_GPIO.5 | length 6741
  Top Layer w10: P3.2 2299,2120 2343.53,2164.53 2504.47,2164.53 2547.5,2121.5 ; Q3.2 2797.99,2195.52 R1.1 2797.99,2087.01 2800,2085 2770,2055 2614,2055 2547.5,2121.5 ; R35.1 2932.01,3622 2921.01,3611 v1(2900,3611) 2898.5,3609.5 2898.5,3356.81 ; PCA9685.26 2931.84,3390.16 2898.5,3356.81 ; ADS1115/ADS1016.10@3830.35,2856.7 3830.35,2898.76 3898.8,2967.2 ; v1(3903.06,2903.06) 3903.06,2962.94 3898.8,2967.2 ; R42.2 4015,3083.4 3898.8,2967.2 ; 2547.5,2121.5 2547.5,2465.93 2640,2558.43 2640,2771.43 2620,2791.43 2620,2943 2654.38,2977.38 2654.38,2978.22 2697.24,3021.08 2714.83,3021.08 2787.28,3093.53 2788.53,3093.53 2810,3115 2810,3268.31 2898.5,3356.81
  Bottom Layer w10: P3.2 2381,2008 4042,2008 4255,2221 P1.1 4255,2327.03 4299.53,2371.56 4299.53,2508.44 4273.44,2534.53 4224.53,2534.53 3903.06,2856 v1(3903.06,2903.06) ; Raspi_GPIO.5 2437.5,3877.5 2689.5,3877.5 2900,3667 v1(2900,3611)
SDA: ADS1115/ADS1016.9 P1.2 P3.1 PCA9685.27 Q4.2 R3.1 R34.1 R43.2 Raspi_GPIO.3 | length 9253.7
  Top Layer w10: P3.1 2199,2066 2277.5,1987.5 2969.93,1987.5 2971.37,1988.94 3253.94,1988.94 ; v1(2761,3690) R34.1 ; v1(2943,3426) 2953.25,3415.75 PCA9685.27 ; Q4.2 3310,2177.44 R3.1 3310,2045 3253.94,1988.94 ; 3870.98,2835 R43.2 4067.02,2927 4190,2927 4235,2972 4286,2972 4309.47,2948.53 4309.47,2799.08 4307,2796.61 4307,2442 P1.2 4330,2315 4330,2065 4270,2005 4270,2004.9 4254.04,1988.94 3253.94,1988.94
  Bottom Layer w10: P3.1 2199,2206 1844,2561 1844,4120 2070,4346 2772,4346 2979.53,4138.47 2979.53,3961.56 2943,3925.03 v1(2943,3426) ; Raspi_GPIO.3 2299,3916 2365,3916 2430,3851 2679.14,3851 2761,3769.14 v1(2761,3690) 2941,3510
SPI_MISO: R6.1 Raspi_GPIO.21 U9250.9 | length 1499.8
  Top Layer w7: 2883.08,2809.15 2882.82,2809.15 ; v1(2884,2946) 2882.99,2947.01 R6.1 2844,2892.39 2844,2825 2859.85,2809.15 2882.82,2809.15 ; U9250.9 2883.08,2808.9 2882.82,2809.15
  Bottom Layer w7: v1(2884,2946) 3201,3263 3201,3914 Raspi_GPIO.21
SPI_MOSI: R7.2 Raspi_GPIO.19 U9250.24 | length 1723.1
  Top Layer w10: U9250.24 3026.65,2951 ; v1(3070,2994.35) 3026.65,2951 ; R7.2 3116,3145 3026.65,3055.65 3026.65,2951
  Bottom Layer w10: Raspi_GPIO.19 3080,4025 3158,4025 3190.47,3992.53 3190.47,3961.56 3226,3926.03 3226,3251.28 3050.5,3075.78 3050.5,3047.68 3070,3028.18 v1(3070,2994.35)
SPI_SCLK: R5.2 Raspi_GPIO.23 U9250.23 | length 1366.8
  Top Layer w10: U9250.23 3050.65,2824.65 3065.01,2839.01 3065.01,2942.99 R5.2 3097.01,3032.99 v1(3073,3057)
  Bottom Layer w10: v1@3071.5,3057.5 3071.5,3068.5 3246,3243 3246,3965.28 3235,3976.28 Raspi_GPIO.23
UBLOX_CS: Raspi_GPIO.24
USART_RX: Q5.1 R40.1 Raspi_GPIO.10 | length 1040.5
  Top Layer w10: R40.1 2146,3600 2185,3639 2185,3679.43 2132.08,3732.35 2116.35,3732.35 2082.4,3766.29 Q5.1 2082.4,4007.67 2106.73,4032 2498,4032 2535,4069 Raspi_GPIO.10
USART_TX: Raspi_GPIO.8
VCC_3.3V: "HMC 5883L.2" "HMC 5883L.4" "HMC 5883L.13" C3.2 C4.2 C6.2 C7.1 MS5611.1 R2.2 R4.2 R5.1 R7.1 R8.1 R11.2 R13.2 Raspi_GPIO.1 Raspi_GPIO.17 U9250.1 U9250.8 U9250.13 | length 8518.3
  Top Layer w5: 2931.57,2340.63 2932.85,2341.91 ; 2943,2339 2949,2339 2953.29,2343.29 2972.62,2362.62 2972.62,2434.39 2971.93,2435.08
  Top Layer w10: U9250.8 2879.35,2824.65 2863,2841 2863,2876 2892,2905 2935,2905 2992,2905 3005,2892 U9250.1 ; 2926.26,2698.74 2926.26,2723 ; 2971.93,2435.08 2971.93,2446.93 2979.21,2454.21 3005,2454.21 3028.75,2430.46
  Top Layer w28: 2745.5,2485.5 2760,2500 2801,2541 v3(2801,2552) ; v3(2926.26,2658.74) 2926.26,2698.74 ; 2935,2905 2935,2915 v3(2975,2955)
  Top Layer w30: Raspi_GPIO.1 2212,3903 3012,3903 ; R2.2 2702.99,2442.99 2745.5,2485.5 ; 2760,2500 3020.46,2500 3090,2430.46 ; Raspi_GPIO.17 3012,3903 ; 3022.52,2428.62 3024.36,2430.46 3028.75,2430.46 3090,2430.46 ; 3064,3872 3064,3875 ; R4.2 R4.2@3295,2395.46 ; R11.2 3483,3680 3483,3496.12 R13.2 3422.23,3435 3500,3357.23 3500,3245 3400,3145 R7.1 R5.1 R8.1 3245,2813.97 C4.2 C3.2 3250,2589.95 C6.2 3295,2544.95 R4.2@3295,2395.46 ; MS5611.1 3553.73,3698.43 C7.1 3340.3,3875 3064,3875 ; 3012,3903 3040,3875 3064,3875 ; 3090,2430.46 3260,2430.46 R4.2@3295,2395.46
  Bottom Layer w28: v3@2789,2550 2806,2550 2914.74,2658.74 v3(2926.26,2658.74) 3080,2812.48 3080,2897 3022,2955 v3(2975,2955)
  Bottom Layer w30: Raspi_GPIO.1 2136,3979 2136,3714.29 2165.29,3685 2206.71,3685 2208.71,3687 2461,3687 2587,3813 2674.71,3813 2720,3767.71 2720,3542.29 2880,3382.29 2978,3382.29 3000,3404.29 3000,3405 3014.02,3419.02 3011.52,3421.52 3011.52,3611.52 3057,3657 3150,3657 3172.5,3634.5 3172.5,3294.5 2843,2965 2843,2742 v3(2926.26,2658.74)
VCC_5V: ADS1115/ADS1016.8 C9.1 C10.2 C11.2 D20.A L1.2 P1.3 P6.1 P6.2 P6.3 P6.4 P6.5 P6.6 P6.7 P6.8 P6.9 PCA9685.28 Q1.1 Q2.1 Q3.1 Q4.1 R1.2 R3.2 R10.2 R12.2 R14.1 R15.1 R16.1 R17.1 R18.1 R19.1 R34.2 R35.2 R36.2 R40.2 R42.1 R43.1 R44.1 R45.1 R49.1 R50.1 Raspi_GPIO.2 Raspi_GPIO.4 | length 15030.5
  Top Layer w10: ADS1115/ADS1016.8 v1(3881.3,2816.7)
  Top Layer w30: P6.1 P6.2 P6.3 P6.4 P6.5 P6.6 P6.7 P6.8 ; R40.2 2092,3690 v2@2128,3654 ; Raspi_GPIO.2 Raspi_GPIO.4 ; v2(2516,4265) R49.1 3426,4265 3601,4440 3750.8,4440 3751.8,4441 3798.2,4441 3974.2,4265 R50.1 ; v2@2530,3210 2558.3,3238.3 R19.1 R19.1@2560,3262.78 ; R18.1 v2(2626.91,3373.09) ; R17.1 v2(2629.9,3485.1) ; R16.1 2629.9,3597.11 2659.01,3568 v2(2667,3568) ; R15.1 2603.45,3709.12 v2@2663.57,3649 ; v2@2643,3765 2586.87,3821.13 R14.1 2562.18,3825 2775,3825 R34.2 3039.02,3780 R36.2 3115,3775 3155,3735 3155,3661.55 3225.73,3661.55 Q1.1 ; v2(2645,2191) 2700.94,2135.06 R1.2 2717.71,2144.79 Q3.1 ; PCA9685.28@3000.98,3447.14 3096,3447.14 ; v2(3096,3398) 3096,3447.14 ; v2@3136,2065 3187.71,2116.71 R3.2 3230,2126.71 Q4.1 ; Q2.1 3229.17,3445 R12.2 3158.12,3447.14 3096,3447.14 ; v2(3635.11,2052) D20.A@3685.35,2102.24 ; C9.1 3926.1,3315 L1.2 3850.07,3204.93 ; R43.1 R42.1 4105,3120 4027.36,3197.64 3857.36,3197.64 3850.07,3204.93 ; P1.3 4223,2458 C10.2 3969.02,2458 C11.2 3887.6,2460 3685.35,2257.76 D20.A@3685.35,2102.24 ; D20.A@3685.35,2102.24 3605,2182.6 3605,2975 3664.26,3034.26 R44.1 R45.1 3795,3149.86 3850.07,3204.93
  Bottom Layer w30: P6.8 P6.9 ; Raspi_GPIO.2 2033.46,3978.46 P6.9 ; Raspi_GPIO.4 2420,4265 v2(2516,4265) ; v2(3096,3398) 3100,3394 3100,3345 3071,3316 2628,3316 2626.91,3314.91 ; v2(3142,2074) 2998,2218 ; v1(3881.3,2816.7) 4156.5,2541.5 4156.5,2164.93 4043.57,2052 v2(3635.11,2052) 3634.61,2052.5 3392.5,2052.5 3227,2218 2998,2218 ; P6.9 2140,3551.54 v2@2140,3645 ; v2@2140,3645 2140,3649 2138,3647 v2(2132,3647) 2134,3645 v2@2140,3645 ; v2@2140,3645 2536,3645 v2(2654,3763) 2654,3672 v2(2670,3656) 2670,3571 v2(2667,3568) 2667,3522.2 v2(2629.9,3485.1) 2629.9,3376.08 v2(2626.91,3373.09) 2626.91,3314.91 ; 2626.91,3314.91 v2(2515,3203) 2440,3278 2376,3278 2314,3216 2314,2398 2521,2191 v2(2645,2191) 2645,2195 2668,2218 2998,2218
pads on no net: "HMC 5883L.3" "HMC 5883L.5" "HMC 5883L.6" "HMC 5883L.7" "HMC 5883L.14" "HMC 5883L.15" "HMC 5883L.16" ADS1115/ADS1016.6 ADS1115/ADS1016.7 MS5611.2 MS5611.4 MS5611.5 MS5611.6 MS5611.7 MS5611.8 P3.3 PCA9685.15 PCA9685.16 PCA9685.17 PCA9685.18 PCA9685.19 PCA9685.20 PCA9685.21 PCA9685.22 Q1.4 Q2.4 Q3.4 Q4.4 Raspi_GPIO.15 Raspi_GPIO.18 Raspi_GPIO.22 Raspi_GPIO.27 Raspi_GPIO.28 Raspi_GPIO.32 Raspi_GPIO.35 Raspi_GPIO.36 Raspi_GPIO.37 U9250.2 U9250.3 U9250.4 U9250.5 U9250.6 U9250.7 U9250.12 U9250.14 U9250.15 U9250.16 U9250.17 U9250.20 U9250.21 U9250.25

## Keep-outs
Keep-Out Layer:
  circle w10: c1940,4010 r60
  circle w10: c4230,4010 r60
  circle w10: c4230,2080 r60
  circle w10: c1940,2080 r60
  lines w5: 1800,2070 1800,4060 1800,4405 ; 1800,2075 ccw(c1905,2075) 1905,1970 4245,1970 ccw(c4245,2075) 4350,2075 ; 1800,4395 cw(c1905,4395) 1905,4500 ; 1900,4500 3325,4500 ; 3310,4500 3530,4500 4245,4500 cw(c4245,4395) 4350,4395 ; 4350,2060 4350,4010 4350,4405 ; 3420,2080 3490,2080 3490,2870 3420,2870 3420,2080

## Other copper
Top Layer:
  rectangle net VCC_3.3V: 2928.29,2336.29 2953.29,2343.29
  rectangle net SDA: 3835,2830 3875,2840

## Text inside footprints (layer, text, board x,y; h text height)
Raspi_GPIO: Top Overlay "1" at 2035,3960 h30; Top Overlay "2" at 2035,4060 h30; Top Overlay "40" at 4115,4060 h30; Top Overlay "39" at 4115,3960 h30